# Altium PCB PCB1.PcbDoc
Units mm, origin at the board's own origin, x right, y up, seen from the top; angles counter-clockwise.
Board outline 152.4 x 101.6 mm, 2 copper layers (Top Layer, Bottom Layer); 14 components, 11 nets, 46 pads, 0 vias.
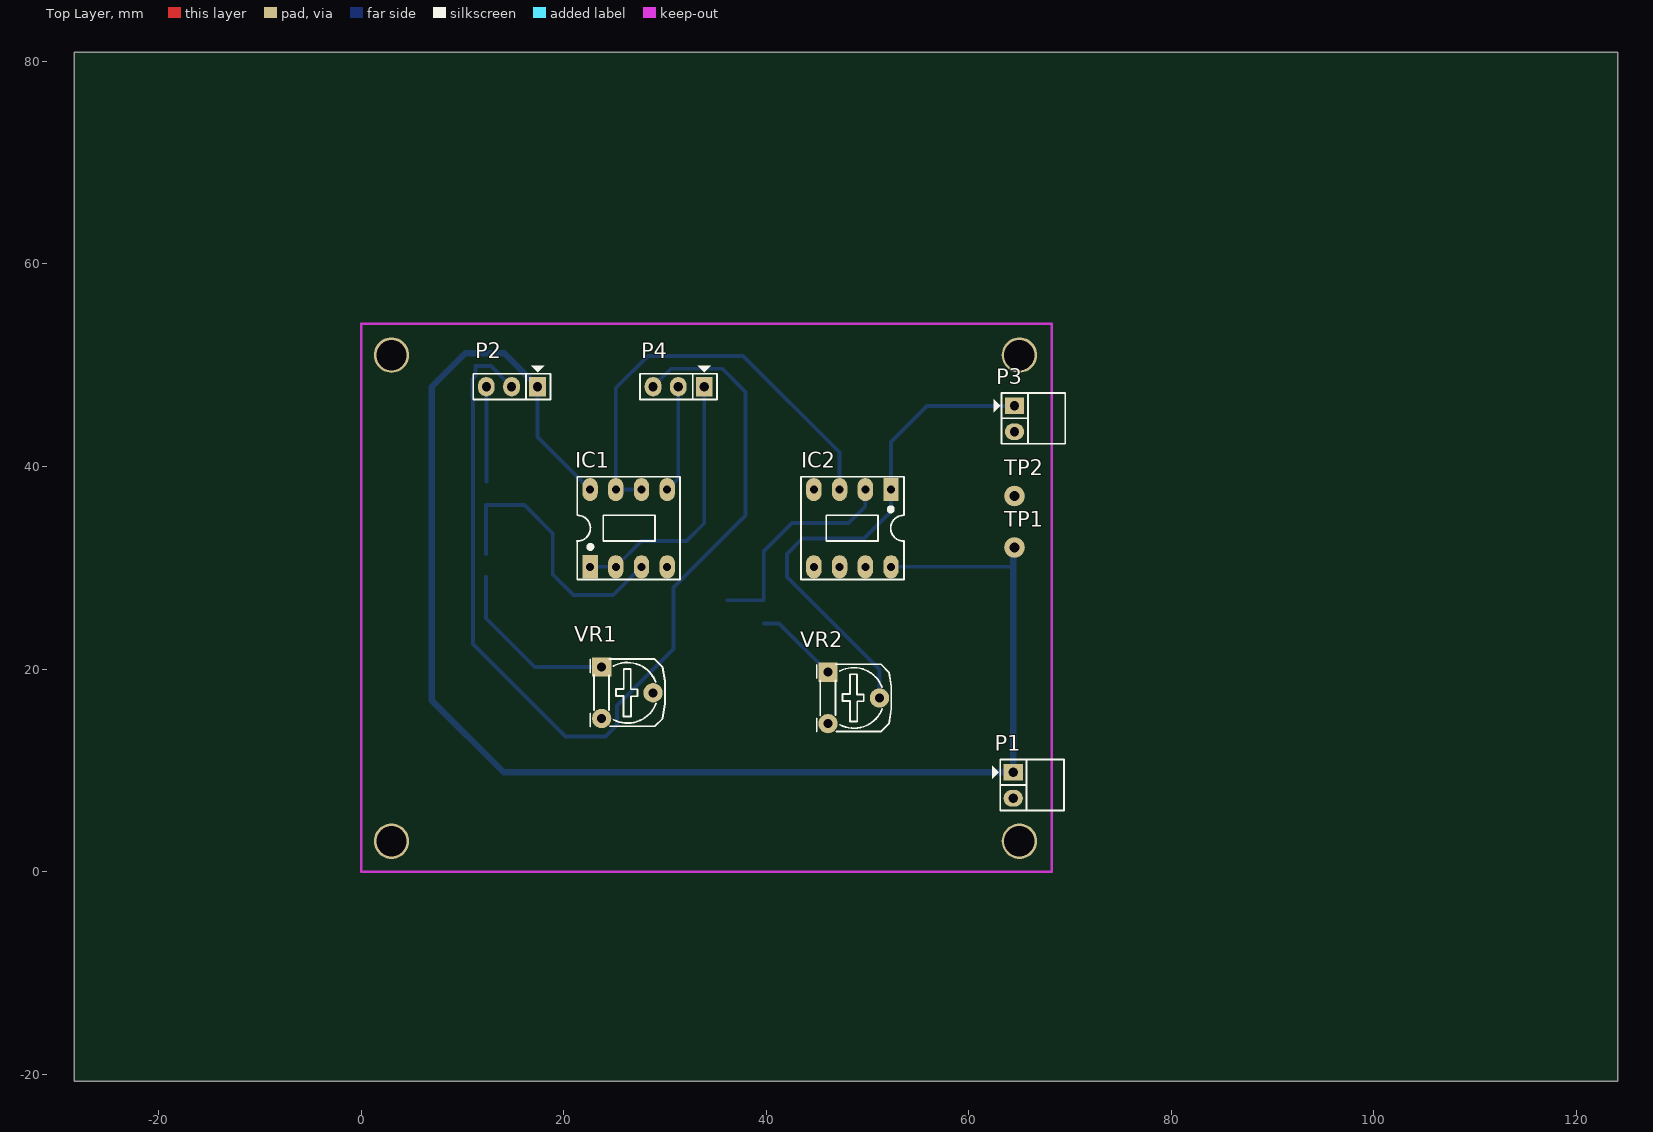
[diagram p0: Top Layer view]
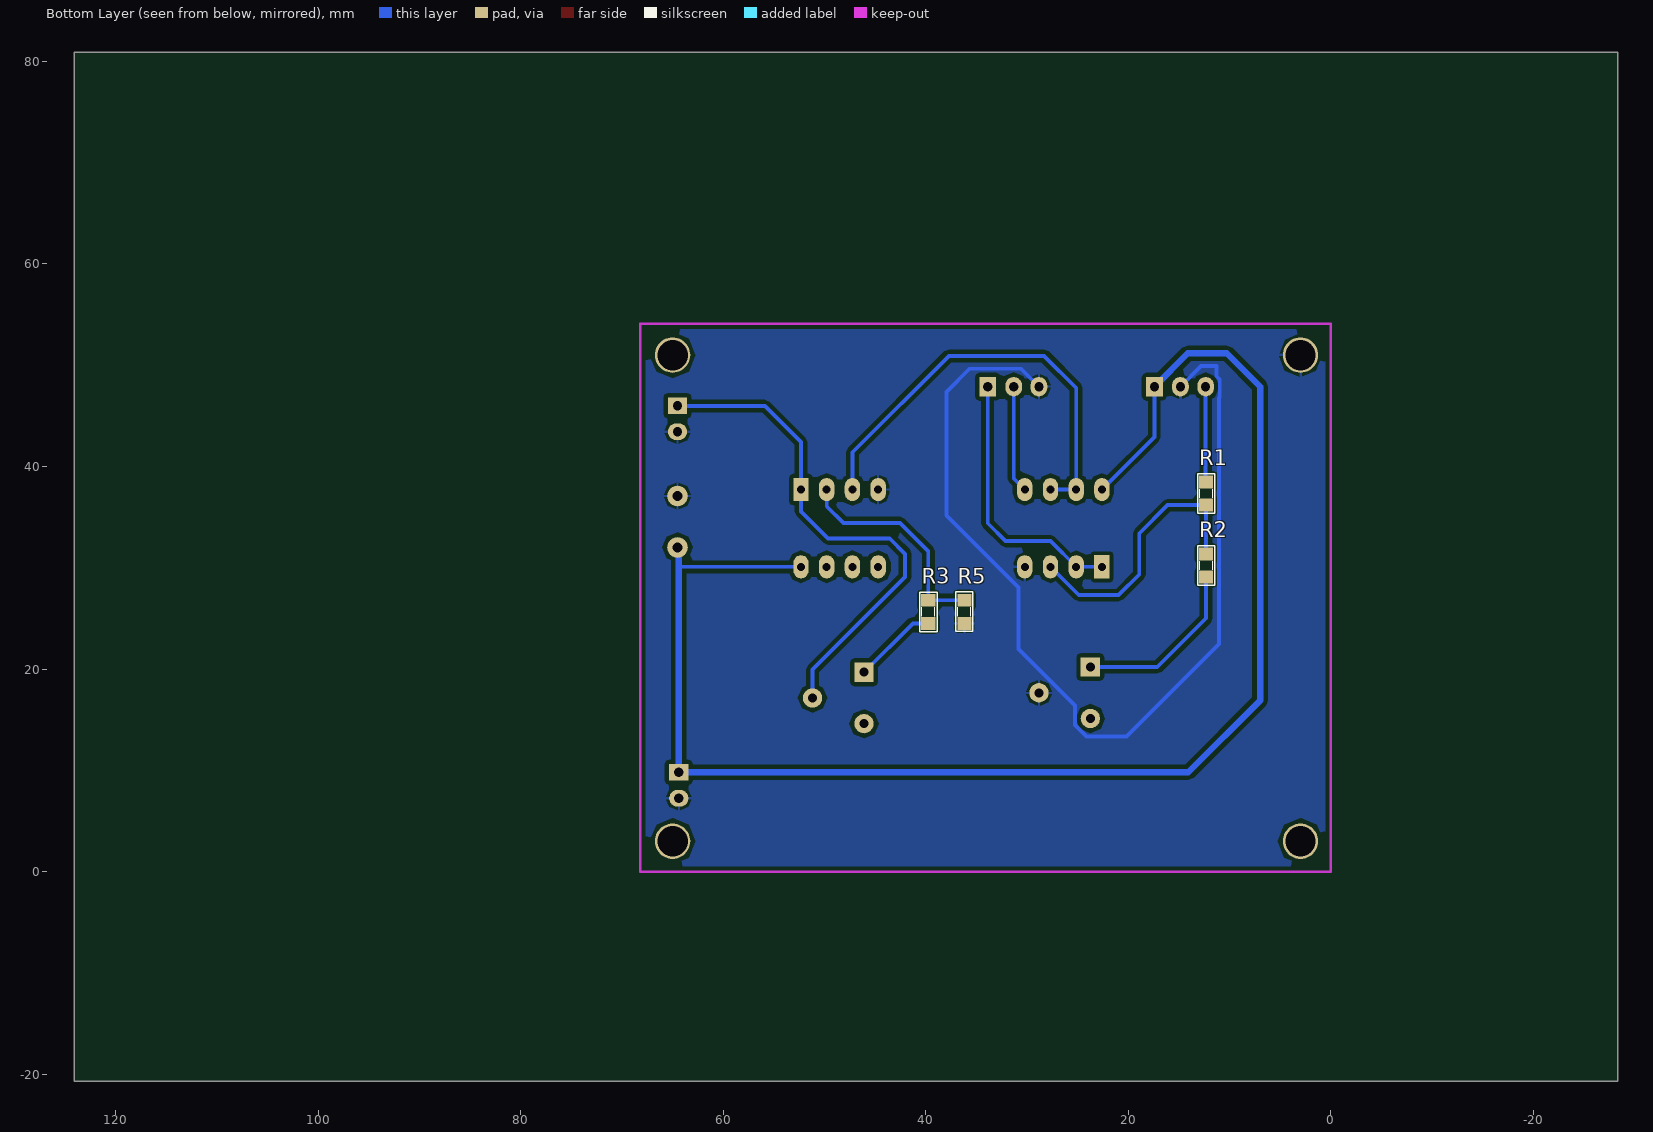
[diagram p1: Bottom Layer view, seen from below]
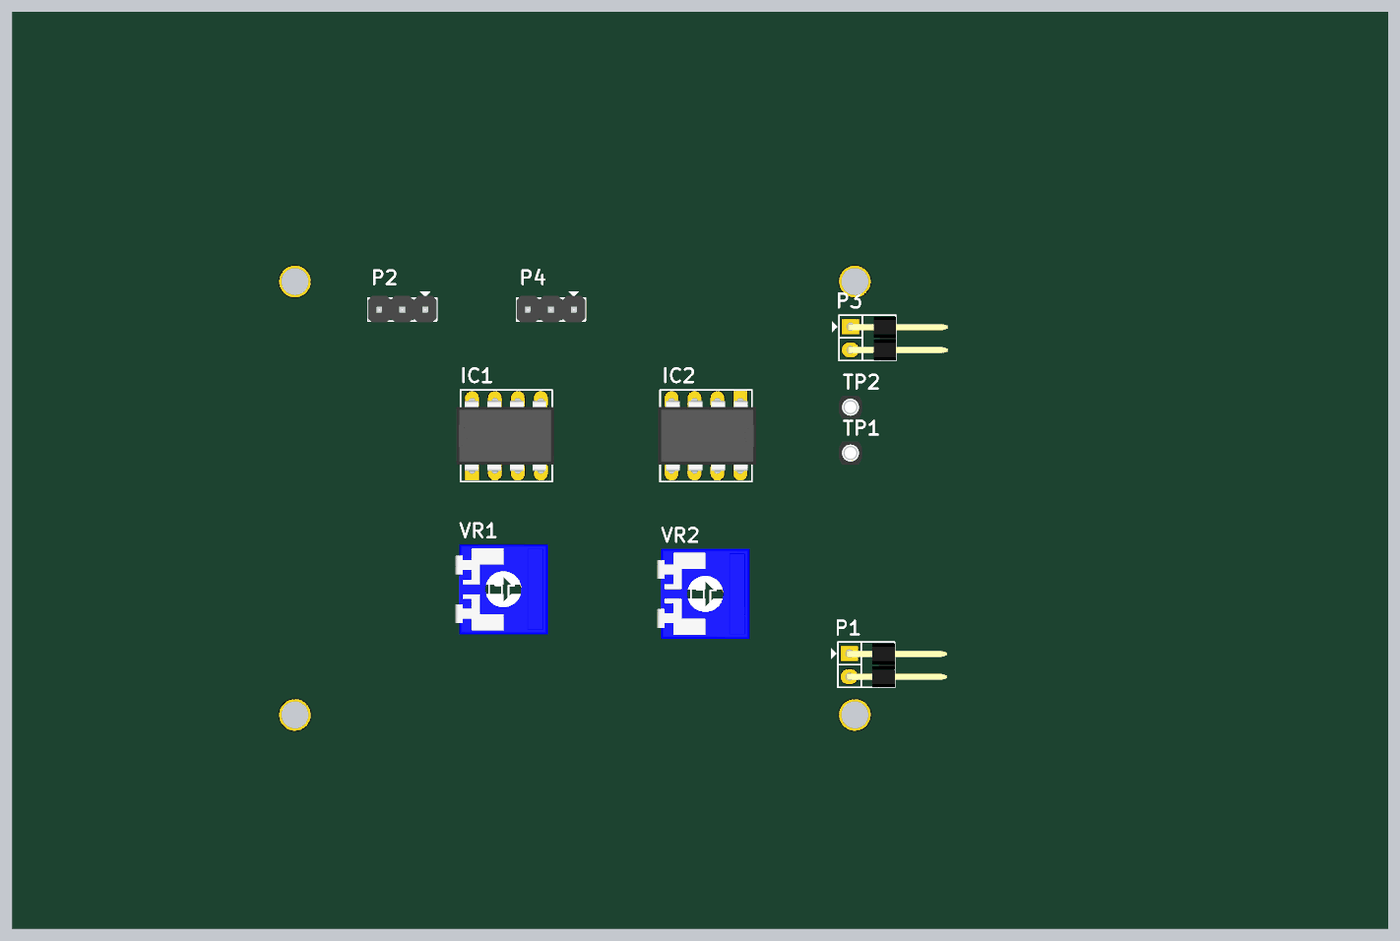
[diagram p2: 3D render of the assembled board from above, using the file's embedded part models]
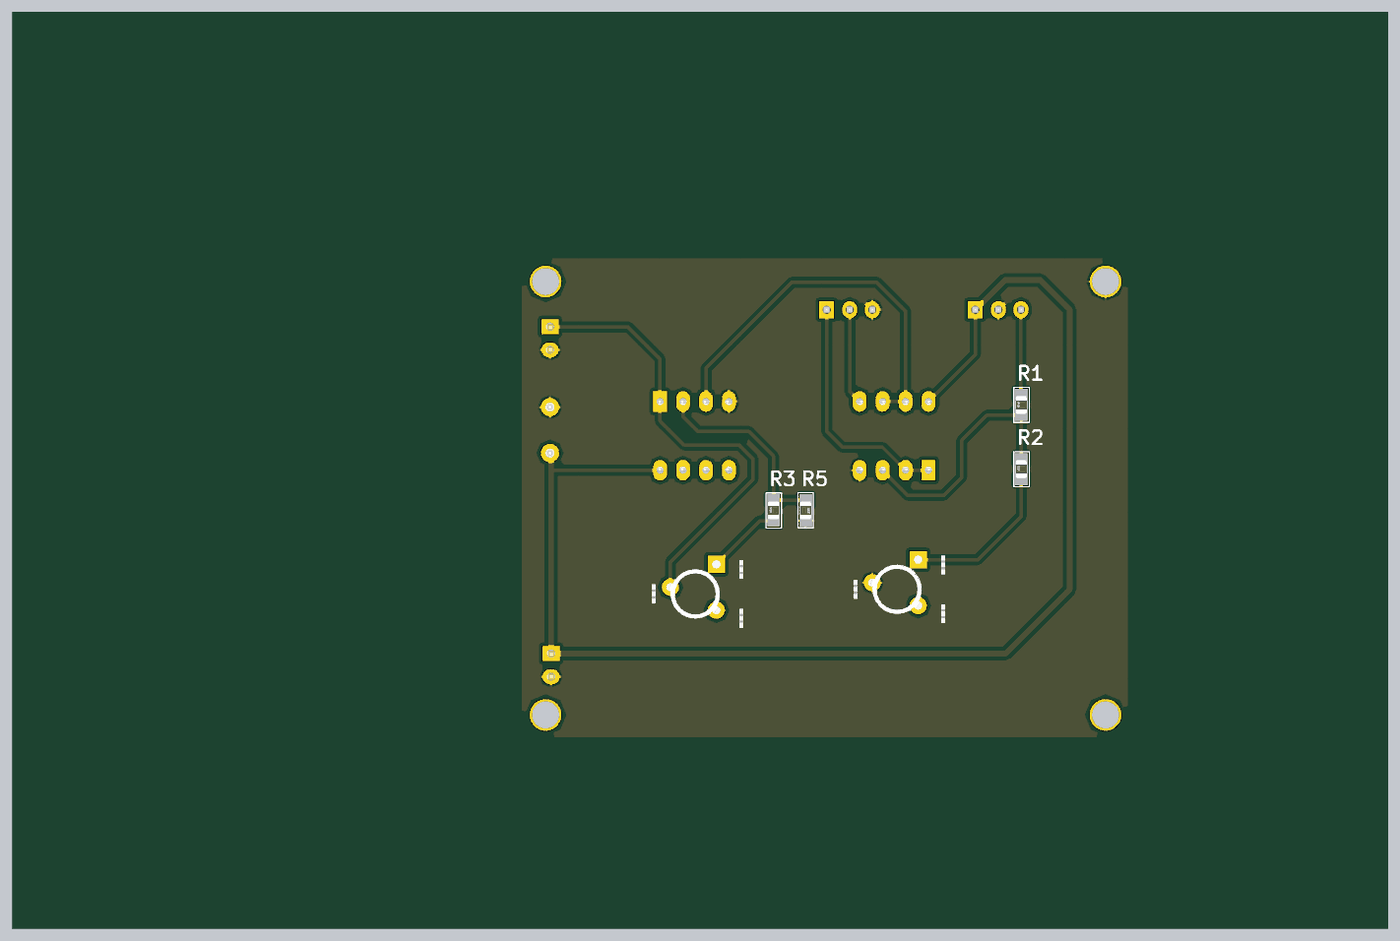
[diagram p3: 3D render of the assembled board from below, using the file's embedded part models]

## Layer stack, top to bottom
Top Solder: solder mask 0.0102, Solder Resist, Dk 3.5
Top Layer: signal copper 0.0356
Dielectric 1: dielectric 0.32, FR-4, Dk 4.8
Bottom Layer: signal copper 0.0356
Bottom Solder: solder mask 0.0102, Solder Resist, Dk 3.5

## Board outline
-28.321,-20.701 124.079,-20.701 124.079,80.899 -28.321,80.899

## Design rules (kind name [scope] priority, off if disabled: settings)
Clearance [All] p1: gap=0.381 ignorepadtopadclearanceinfootprint=FALSE except(0: Arc-Hole Track-Hole SMDPad-Hole THPad-Hole Via-Hole Fill-Hole Poly-Hole Region-Hole Text-Hole)
PolygonConnect [All] p1: connectstyle=Relief reliefconductorwidth=0.254 reliefentries=4 polygonreliefangle="90 Angle" airgapwidth=0.254
RoutingVias [All] p1: holewidth=0.711 width=1.27 viastyle="Through Hole" minholewidth=0.711 minwidth=1.27 maxholewidth=0.711 maxwidth=1.27
SolderMaskExpansion [All] p1: expansion=0.102
Width [All] p1: maxlimit=0.635 minlimit=0.254 preferedwidth=0.381 minimp=50.000000 maximp=50.000000 favimp=50.000000
30 further rules are at their usual default settings.

## Components (designator, comment, footprint, x,y, rotation, side; value= is the part's Value field where it differs from the comment)
IC1 "LM358" DIP8 26.289,33.909 r0 top
IC2 "LM358" DIP8 48.641,33.909 r180 top
P1 "Header 2H" JP2H 64.389,9.804 r270 top
P2 "Header 3" JP3 14.884,47.879 r180 top
P3 "Header 2H" JP2H 64.516,45.999 r270 top
P4 "Header 3" JP3 31.344,47.879 r180 top
R1 "RESISTOR SMD" RES-SM-0805 12.319,36.195 r90 bottom value=2.2k
R2 "RESISTOR SMD" RES-SM-0805 12.319,29.083 r90 bottom value=830
R3 "RESISTOR SMD" RES-SM-0805 39.751,24.511 r90 bottom value=2K
R5 "RESISTOR SMD" RES-SM-0805 36.195,26.797 r270 bottom value=1K
TP1 "Test Point" TP 64.516,32.004 r0 top
TP2 "Test Point" TP 64.516,37.084 r0 top
VR1 "10K" "Varistor 1" 23.749,20.193 r270 top value="VR 10K"
VR2 "10K" "Varistor 1" 46.101,19.685 r270 top value="VR 10K"

## Footprints (in the part's own frame and the unit in brackets; to place one, negate y for a bottom-side part, rotate by r counter-clockwise, add the part's x,y. Pads: shape width x height; smd on the part's side, far side on the other; paste and mask are expansions set on the pad)
DIP8 [mil] "DIP, 8-Leads, Row Spacing 7.62mm, Pitch 2.54mm, Body 9.91x6.73mm"
  rect 60x90 hole 31: 1(-145,-150)
  oval 60x90 hole 31: 2(-45,-150) 3(55,-150) 4(155,-150) 5(155,150) 6(55,150) 7(-45,150) 8(-145,150)
  silkscreen extent -195,-200 205,200, body extent -213,-153 213,153, height 177
JP2H [mil]
  rect 65x75 hole 36: 1(0,0)
  oval 65x75 hole 36: 2(101,0)
  silkscreen extent -50,-81 148,197, body extent -44,-14 148,424, height 99
JP3 [mil] "Jumper 3"
  rect 65x75 hole 36: 1(-100,0)
  oval 65x75 hole 36: 2(1,0) 3(99,0)
  silkscreen extent -150,-81 150,50, body extent -150,-60 150,55, height 355
RES-SM-0805 [mil]
  rect 50x55 smd: 1(0,0) 2(90,0)
  silkscreen extent -32,-34 121,33, body extent 6,-25 84,25, height 31
TP [mil] "Connect 1"
  round 80 hole 39: TP1(0,0)
  body extent -50,-50 50,50, height 179
"Varistor 1" [mil] "Resistor Variable"
  rect 75x75 hole 35: 1(0,0)
  round 75 hole 35: 2(100,200) 3(200,0)
  silkscreen extent -31,-44 231,246, body extent -68,-117 326,285, height 165

## Part data
IC1 IC2: "Low-Power Dual Operational Amplifier"
P1 P3: "Header, 2-Pin, Right Angle", LatestRevisionDate=17-Jul-2002, LatestRevisionNote="Re-released for DXP Platform.", Publisher="Altium Limited"
P2 P4: "Header, 3-Pin", LatestRevisionDate=17-Jul-2002, LatestRevisionNote="Re-released for DXP Platform.", Publisher="Altium Limited"
R1 R2 R3 R5: "Resistor"
VR1 VR2: library part "Var Resistor", "Var Resistor"

## Free pads (board coordinates)
  round 3.5 hole 3: 2(3,3) 2(3,51) 2(65,3) 2(65,51)

## Nets (pads, with @x,y where several pads share a name; then routed paths per layer and width w, separated by ;. In a path a pad name is that pad's centre, name@x,y a point inside that pad or via, vN(x,y) a via of type N, cw(c..) or ccw(c..) an arc to the next point about the centre after c; other vN are vias at no path point)
12V: IC1.8 IC2.8 P1.1 P2.1 TP1.TP1 | length 151.1
  Bottom Layer w0.381: P2.1 17.424,42.901 IC1.8 ; IC2.8 64.389,30.099
  Bottom Layer w0.635: P2.1 14.122,51.181 10.287,51.181 6.985,47.879 6.985,16.891 14.072,9.804 P1.1 64.389,30.099 TP1.TP1@64.389,32.004
AO+: IC2.1 P3.1 VR2.2 | length 51
  Bottom Layer w0.381: VR2.2 51.181,19.939 42.037,29.083 42.037,31.369 43.561,32.893 49.657,32.893 52.324,35.56 IC2.1 52.324,42.418 55.88,45.974 64.211,45.974 64.516,46.279 P3.1
GND: IC1.4 IC2.4 P1.2 P2.2 P3.2 P4.3 pad.2@3,51 R5.2 TP2.TP1 VR1.2 | length 99.5
  Bottom Layer w0.381: P2.2 12.827,49.911 11.303,49.911 11.303,48.915 10.973,48.585 10.973,46.843 11.049,46.767 11.049,22.479 20.193,13.335 24.126,13.335 25.273,14.482 25.273,16.383 30.861,21.971 30.861,28.067 37.973,35.179 37.973,47.371 35.687,49.657 30.607,49.657 P4.3
NetIC1_3: IC1.3 R1.1 R2.2 | length 27.4
  Bottom Layer w0.381: R2.2 R1.1 16.129,36.195 18.923,33.401 18.923,29.337 20.955,27.305 24.892,27.305 IC1.3
NetIC1_6: IC1.6 IC1.7 IC2.3 | length 43.6
  Bottom Layer w0.381: IC1.6 IC1.7 25.146,47.752 28.321,50.927 37.719,50.927 47.244,41.402 IC2.3
NetIC2_2: IC2.2 R3.2 R5.1 | length 21.9
  Bottom Layer w0.381: R5.1 R3.2 39.751,31.623 42.545,34.417 48.133,34.417 49.784,36.068 IC2.2
NetR2_1: R2.1 VR1.1 | length 17.5
  Bottom Layer w0.381: R2.1 12.319,25.019 17.145,20.193 VR1.1
NetR3_1: R3.1 VR2.1 | length 8.3
  Bottom Layer w0.381: R3.1 41.275,24.511 VR2.1
SENOUT: P2.3 R1.2 | length 9.4
  Bottom Layer w0.254: R1.2 R1.2@12.37,38.532
  Bottom Layer w0.381: R1.2@12.37,38.532 P2.3
STMIN: IC1.1 IC1.2 P4.1 | length 26.6
  Bottom Layer w0.381: IC1.1 IC1.2 27.686,32.639 32.131,32.639 33.884,34.392 P4.1 P4.1@33.909,47.854
STMOUT: IC1.5 P4.2 | length 10.6
  Bottom Layer w0.381: IC1.5 31.318,38.811 P4.2
pads on no net: IC2.5 IC2.6 IC2.7 VR1.3 VR2.3

## Polygon pours and split planes (outlines as drawn)
GND on Bottom Layer "GND" (solid, remove dead copper, pour order 0): -1.143,57.531 -0.889,57.785 70.739,57.785 70.739,-2.413 70.231,-1.905 -1.905,-1.905 -1.905,-0.127 -1.905,7.239

## Keep-outs
Keep-Out Layer:
  lines w0.254: 0,0 68.199,0 68.199,54.102 0,54.102 0,10.16 0,0